# Altium PCB uku20710_proc_mount.PcbDoc (part 1 of 3)
Units mm, origin at the board's own origin, x right, y up, seen from the top; angles counter-clockwise.
Board outline 354.7 x 156.7 mm, 4 copper layers (Top Layer, MidLayer1, MidLayer2, Bottom Layer); 269 components, 535 nets, 989 pads, 687 vias.
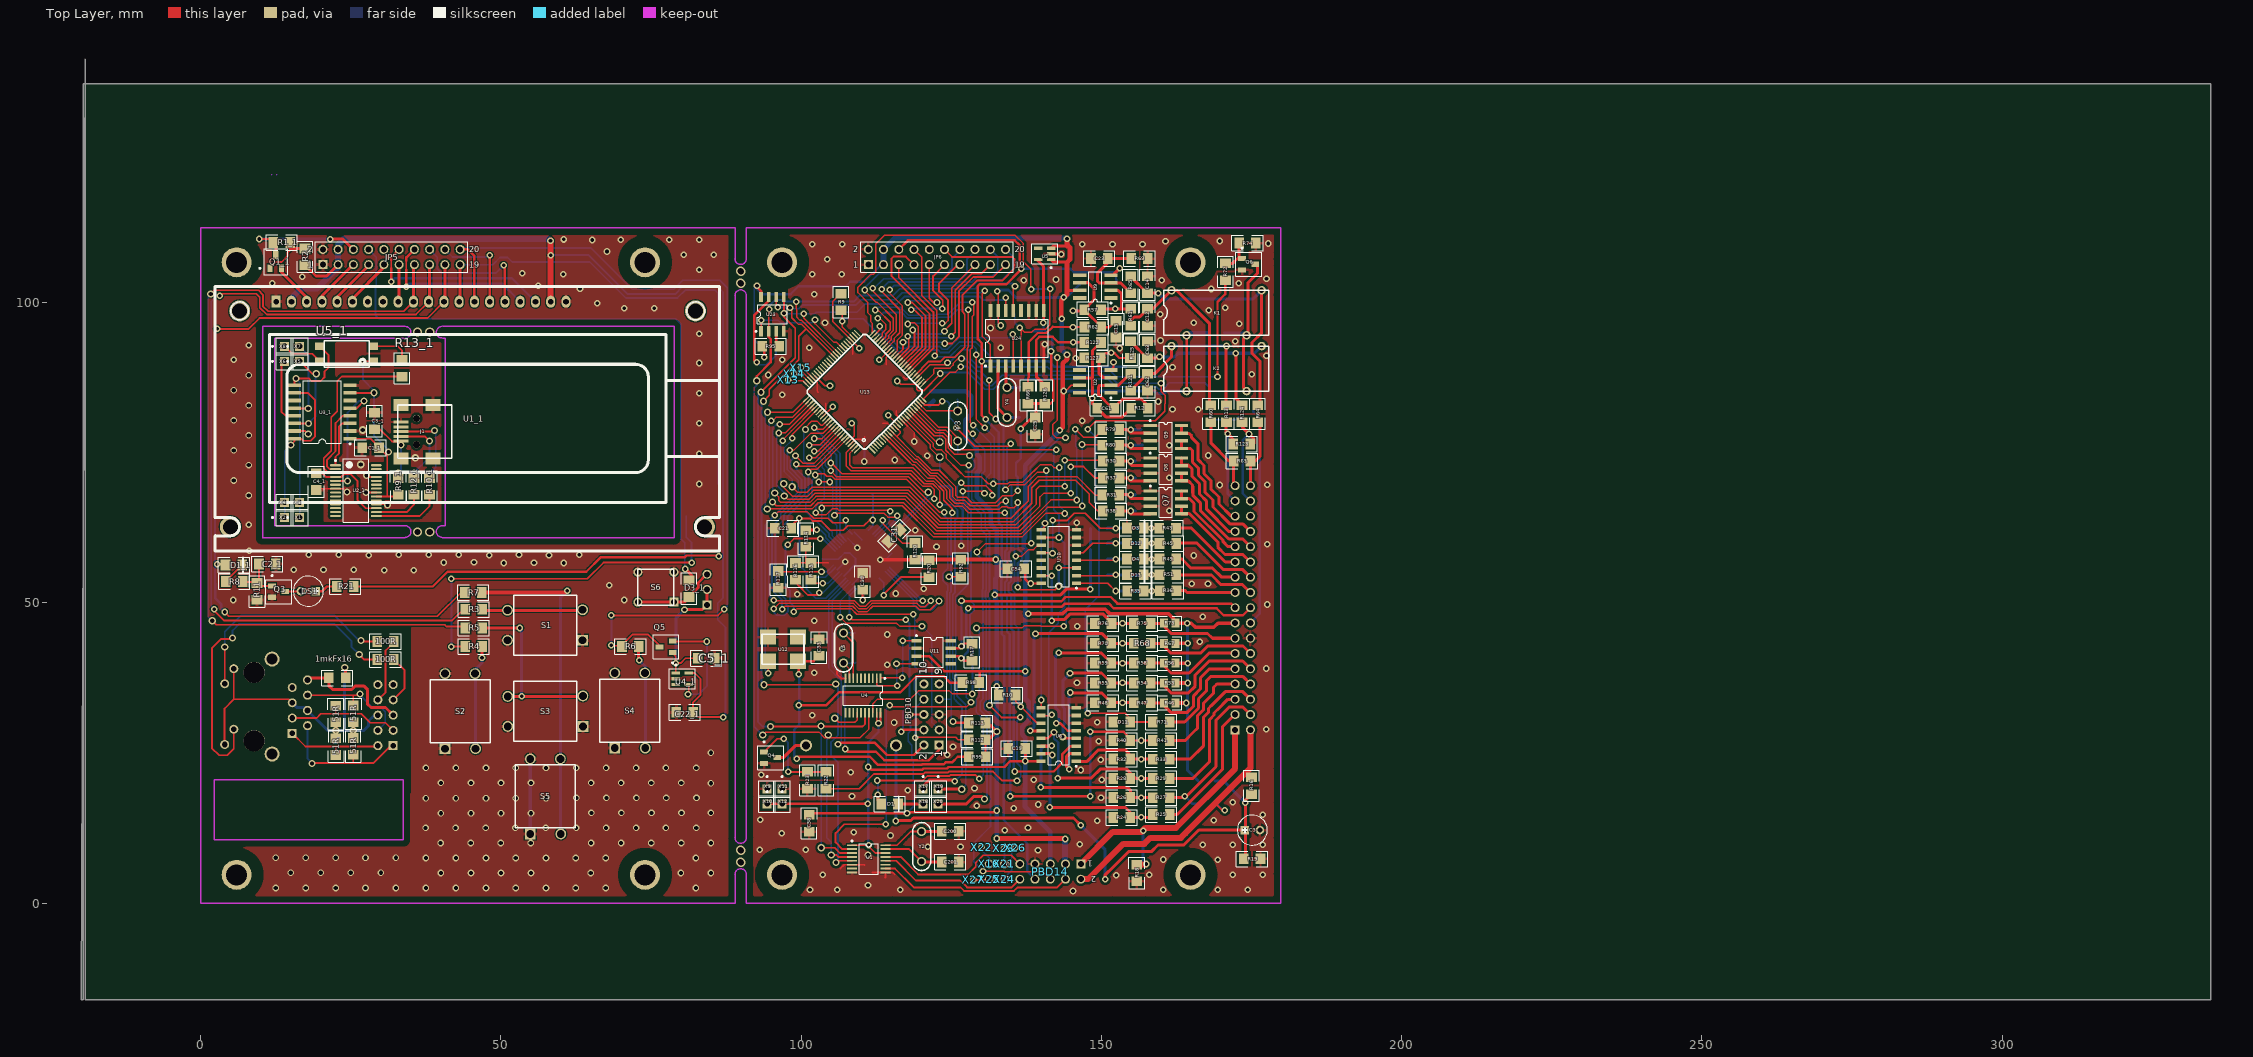
[diagram p0: Top Layer view]
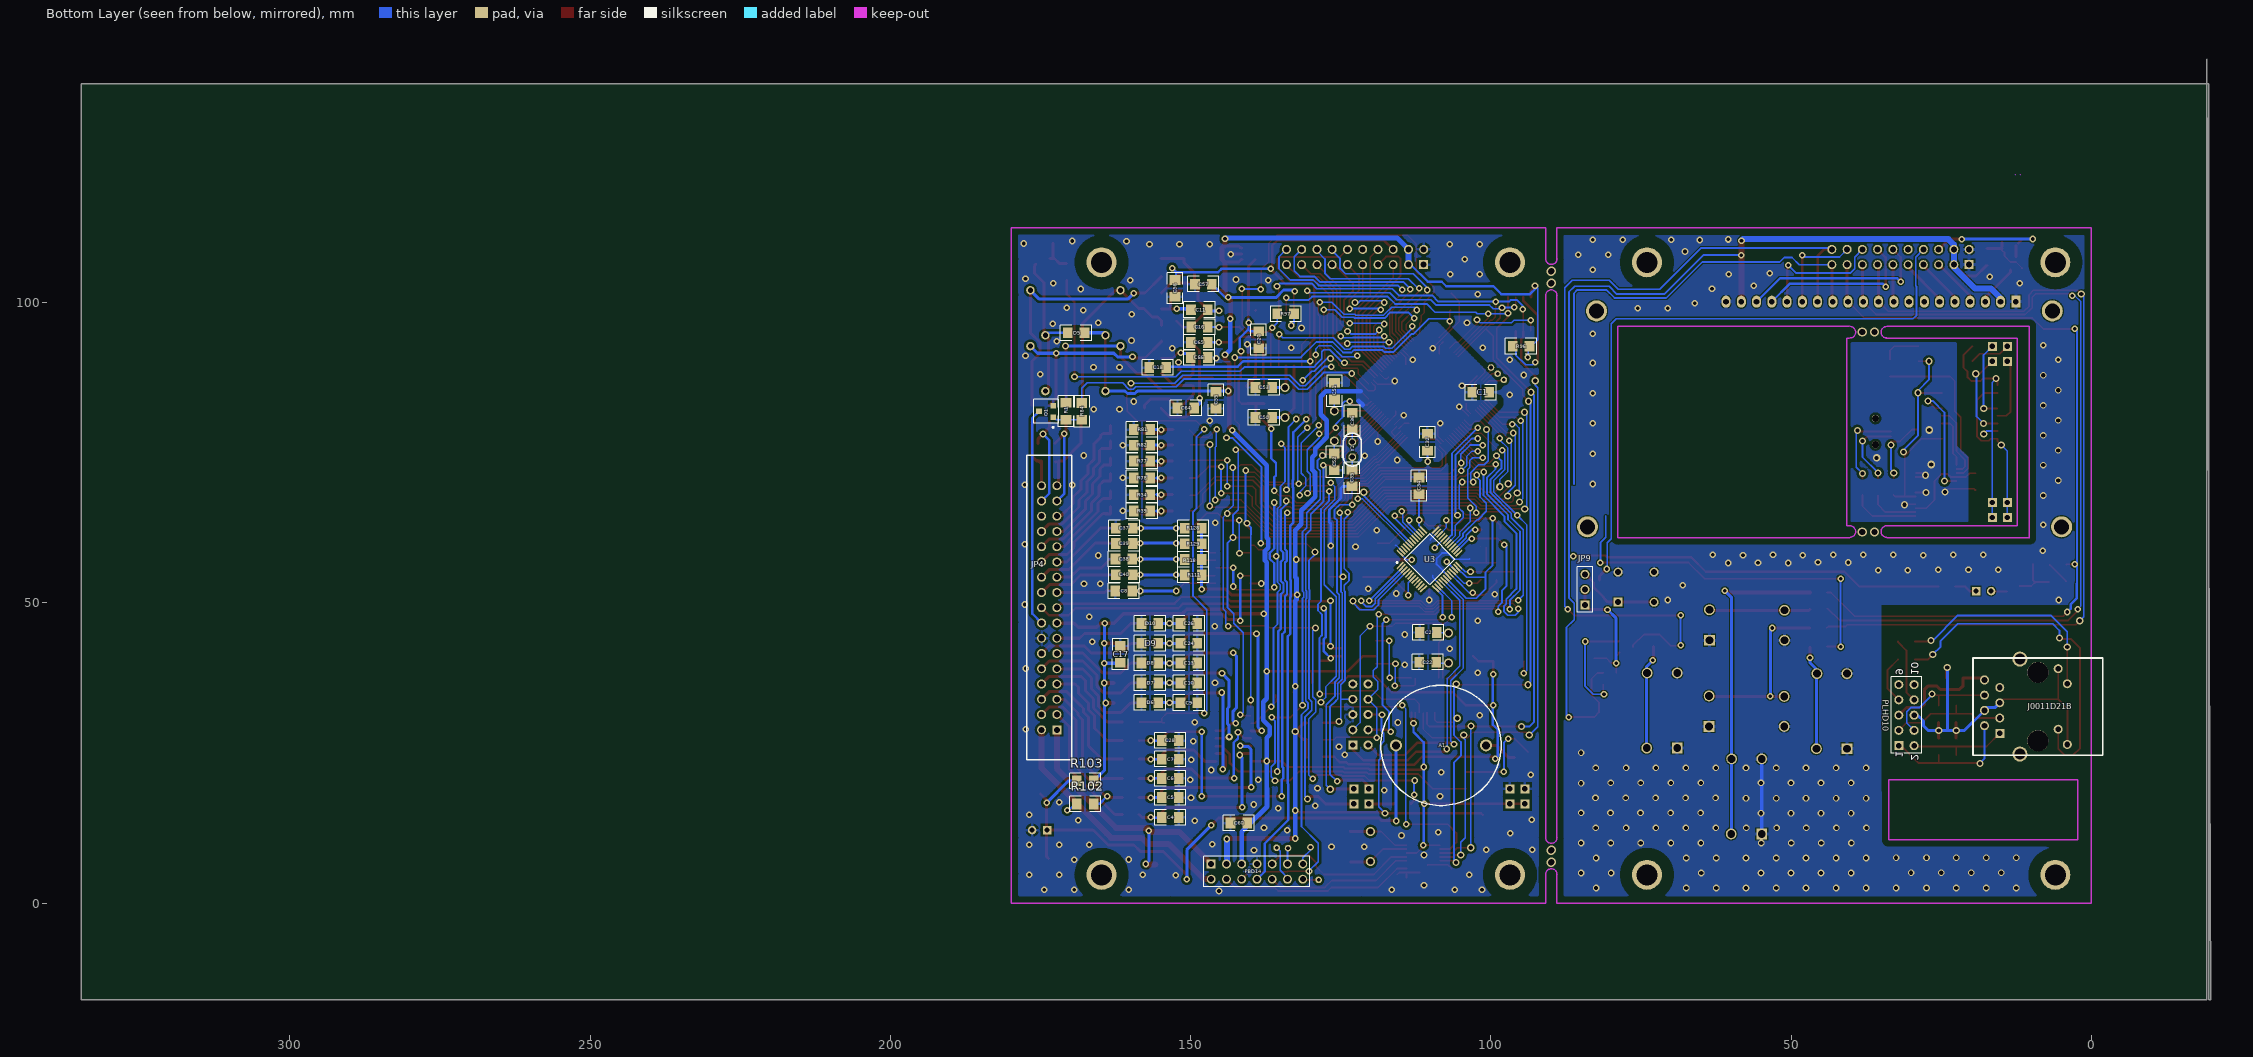
[diagram p1: Bottom Layer view, seen from below]

## Layer stack, top to bottom
Top Layer: signal copper 0.0356
Dielectric: core 0.32, FR-4, Dk 4.8
MidLayer1: signal copper 0.0356
Dielectric: prepreg 0.32, FR-4, Dk 4.8
MidLayer2: signal copper 0.0356
Dielectric: core 0.32, FR-4, Dk 4.8
Bottom Layer: signal copper 0.0356

## Board outline
-19.226,140.55 -19.226,-16.15 334.774,-16.15 334.774,136.4 -19.576,136.4 -19.576,-16.15 -19.926,-16.15

## Design rules (kind name [scope] priority, off if disabled: settings)
Clearance Holes [InPoly vs HasPad('Free-0') Or HasPad('Free-1') Or HasPad('Free-2') Or HasPad('Free-3')] p1: gap=2
Clearance Clearance_2 [All vs InPoly and InNet(GND_P)] p2: gap=1
Clearance Высоковольтное_2 [InNet(NetC511_2) or
InNet(NetD500_1) or
InNet(NetD503_1) or
InNet(NetD501_1) or
InNet(NetC500_2) or
InNet(NetC512_2) or
InNet(NetD500_2) or
InNet(NetD505_1) or
InNet(NetD506_1) or
InNet(NetD505_2) or
InNet(NetBT2_1) or
InNet(NetC516_2) or
InNet(NetC516_1) or
InNet(NetD20_2)  or
InNet(NetC510_1) or
InNet(NetC513_2) or
InNet(NetC517_1) vs InPoly] p3: gap=0.6
Clearance Высоковольтное [InNet(NetC505_2) or InNet(NetFU500_1)
or InNet(NetC511_1)or InNet(NetC502_2) vs InPoly] p4: gap=1
Clearance Clearance_1 [InComponent(U1)] p5: gap=0.19
Clearance Keep_Out [OnLayer('Keep-Out Layer')] p6: gap=1
Clearance Poly_Poly [InPoly vs InPoly] p7: gap=1
Clearance Poly [InPoly] p8: gap=0.4
Clearance "Для разъёма и индикатора" [InComponent(JP1) or InComponent(U2)] p9: gap=0.3
Clearance [All] p10: gap=0.18
ComponentClearance [All] p1: gap=0.254 collisioncheckmode=0
HoleSize [All] p1: absolutevalues=TRUE maxlimit=5 minlimit=0.025 maxpercent=80.000 minpercent=20.000
PolygonConnect [All] p1: connectstyle=Relief reliefconductorwidth=0.4 reliefentries=4 polygonreliefangle="90 Angle"
RoutingLayers [All] p1: top layer=Horizontal mid layer 1="Not Used" mid layer 2="Not Used" bottom layer=Vertical
RoutingVias [All] p1: holewidth=0.6 width=1.1 viastyle="Through Hole" minholewidth=0.6 minwidth=1.1 maxholewidth=0.7 maxwidth=1.2
SolderMaskExpansion [All] p1: expansion=0.102
TestPointUsage [All] p1: valid=0 allowmultiple=FALSE
Testpoint [All] p1: side=15 testpointundercomponent=TRUE minsize=1.016 maxsize=2.54 preferedsize=1.524 minholesize=0 maxholesize=1.016 preferedholesize=0.813 testpointgrid=0.025 style=1023 order=-539222988
Width [All] p1: maxlimit=2 minlimit=0.2 preferedwidth=0.254 toplayer_prefwidth=0.4 midlayer1_prefwidth=0.3 midlayer2_prefwidth=0.3 bottomlayer_prefwidth=0.4 minimp=50.000000 maximp=50.000000 favimp=50.000000
15 further rules are at their usual default settings.

## Classes and differential pairs
component class IBPV11: +IAKB1 C4 C5 C6 C7 C8 C9 C10 C11 C12 C13 C14 C15 C16 C17 C18 C19 C20 C23 C24 C25 C26 C28 C37 C38 C39 C40 C61 C62 C63 C64 C65 C66 D3 D4 D5 D6 D7 D8 D9 D10 D11 D12 D13 K1 K2 NetC25_1 NetJ1_2 NetU14_4 NetU14_5 P0_3 P0_8_ P0_9_ P1_29 P1_31 PROG1 Q1 Q6 Q7 Q8 Q9 R1 R12 R13 R24 R25 R26 R27 R28 R29 R30 R31 R32 R33 R34 R35 R36 R37 R38 R39 R40 R41 R43 R45 R46 R47 R48 R49 R51 R53 R54 R55 R56 R57 R58 R59 R60 R61 R62 R63 R64 R65 R66 R67 R68 R69 R70 R71 R72 R73 R74 R75 R76 R77 R78 R79 R80 R81 R82 R84 R111 R118 R121 R122 R123 R124 R125 R126 R127 R128 R129 U2 U6 U9 U10 UU2 X39 X40 X41 X42 X43 X44 X45 X46 X47
component class CPU: A1 C1 C2 C3 C22 C35 C36 C50 C51 C52 C53 C54 C55 C56 C57 C58 C60 C200 C201 D1 JP4 JP6 PBD14 Q4 R9 R10 R16 R17 R18 R19 R22 R23 R92 R95 R96 R97 R102 R103 U1 U4 U5 U11 U13 U23 U24 X9 X10 X11 X12 X13 X14 X15 X16 X17 X18 X19 X20 X21 X22 X23 X24 X25 X26 X27 Y1 Y2 Y3 Y4 Y5
component class ETH: C21 C30 C31 C32 C33 C34 PBD10 R20 R98 R99 R112 R113 R114 R115 R116 R117 R120 U3 U12

## Components (designator, comment, footprint, x,y, rotation, side; value= is the part's Value field where it differs from the comment)
1mkFx16 "0.1" C3216-1206 22.75,37.501 r0 top (schematic designator C303)
51R "49.9R" _1206#1 22.506,26.058 r90 top (schematic designator R301)
51R "49.9R" _1206#1 25.406,26.058 r270 top (schematic designator R302)
51R "49.9R" _1206#1 22.506,31.459 r270 top (schematic designator R303)
51R "49.9R" _1206#1 25.406,31.509 r90 top (schematic designator R304)
100R "K10" _1206#1 30.8,40.551 r0 top (schematic designator R305)
100R "K10" _1206#1 30.8,43.551 r0 top (schematic designator R306)
A1 "EFM260" Pjezo15 103.3,26.256 r0 bottom
C1 "1.0" _1206#1 101.674,85.05 r180 bottom
C1_1 "1.0" _1206#1 28.307,75.82 r0 top (schematic designator C1)
C2 "Cap Semi" _1206#1 110.402,45.061 r180 bottom
C2_1 "1.0" _1206#2 11.103,56.415 r180 top (schematic designator C2)
C3 "22.0 x 50" el3 173.874,12.15 r0 top
C3_1 "1.0" C3216-1206 28.957,80.271 r270 top (schematic designator C3)
C4 "1.0" _1206#3 153.374,14.25 r180 bottom (schematic designator C11)
C4_1 "1.0" C3216-1206 19.255,70.169 r90 top (schematic designator C4)
C5 "1.0" _1206#3 153.374,17.55 r180 bottom
C5_1 "1.0" _1206#1 84.197,40.761 r180 top (schematic designator C5)
C6 "1.0" _1206#3 153.374,20.75 r180 bottom (schematic designator C7)
C7 "1.0" _1206#3 153.374,23.95 r180 bottom (schematic designator C13)
C8 "1.0" _1206#3 161.115,51.963 r0 bottom (schematic designator C?)
C9 "1.0" _1206#3 150.274,33.35 r180 bottom (schematic designator C8)
C10 "1.0" _1206#3 150.274,36.65 r180 bottom (schematic designator C16)
C11 "0.1" _1206#3 148.524,98.8 r0 bottom
C12 "1.0" _1206#3 157.674,97.55 r90 top
C13 "1.0" _1206#3 150.274,39.95 r180 bottom
C14 "1.0" _1206#3 157.674,102.95 r270 top
C15 "1.0" _1206#3 152.424,95.574 r90 top
C16 "1.0" _1206#3 148.524,95.9 r180 bottom
C17 "1.0" _1206#3 161.715,41.41 r270 bottom
C18 "1.0" _1206#3 155.474,89.15 r180 bottom
C19 "1.0" _1206#3 135.884,25.705 r0 top
C20 "1.0" _1206#3 138.659,93.803 r90 bottom
C21 "0.1" C3216-1206 96.975,62.401 r180 top
C22 "Cap Semi" _1206#1 110.502,40.11 r180 bottom
C22_1 "1.0" _1206#1 80.6,31.751 r180 top (schematic designator C?)
C23 "0.1" _1206#3 149.662,107.327 r180 top
C24 "1.0" _1206#3 150.274,43.25 r180 bottom
C25 "1.0" _1206#3 138.974,79.45 r90 top
C26 "1.0" _1206#3 150.274,46.55 r180 bottom
C28 "1.0" _1206#3 153.374,27.05 r180 bottom
C30 "0.1" _1206#1 110.252,53.535 r270 top
C31 "0.1" _1206#1 115.479,61.2 r45 top
C32 "0.1" _1206#1 110.551,76.718 r270 bottom
C33 "0.1" _1206#1 102.976,42.56 r90 top
C34 "10,0x16" C3216-1206 111.952,69.467 r90 bottom
C35 "33" _1206#1 123.124,70.8 r90 bottom
C36 "33" _1206#1 123.074,80.25 r270 bottom
C37 "1.0" _1206#1 161.065,62.416 r0 bottom
C38 "1.0" _1206#1 161.115,57.264 r0 bottom
C39 "1.0" _1206#1 161.065,59.865 r0 bottom
C40 "1.0" _1206#1 161.065,54.664 r0 bottom
C50 "10" _1206#1 137.774,80.85 r180 bottom
C51 "10" _1206#3 126.024,85.25 r270 bottom
C52 "10" _1206#3 126.074,73.45 r90 bottom
C53 "10" _1206#1 137.774,85.85 r180 bottom
C54 "1.0" _1206#3 135.758,55.664 r0 top
C55 "1.0" _1206#3 145.774,83.75 r90 bottom
C56 "1.0" _1206#3 152.574,102.35 r90 bottom
C57 "1.0" _1206#3 147.874,103.05 r180 bottom
C58 "1.0" _1206#1 101.326,13.302 r90 top
C60 "1.0" _1206#3 141.96,13.303 r180 bottom
C61 "0.1" _1206#3 150.724,82.4 r0 top
C62 "1.0" _1206#3 157.674,86.75 r90 top
C63 "1.0" _1206#3 157.674,92.15 r270 top
C64 "1.0" _1206#3 150.774,82.45 r180 bottom
C65 "1.0" _1206#3 148.574,93.35 r180 bottom
C66 "0.1" _1206#3 148.574,90.85 r180 bottom
C200 "10" _1206#1 124.805,11.953 r180 top (schematic designator C2)
C201 "10" _1206#1 124.805,6.802 r180 top
D1 "LL4148" _1206d#1 114.729,16.503 r180 top
D1_1 "LL4148" _1206d#2 5.548,56.279 r180 top (schematic designator D1)
D3 "BZV55-C5V6" _1206d#1 155.663,62.416 r180 top
D3_1 "LL4148" _1206d#3 81.35,52.351 r90 top (schematic designator D3)
D4 "BZV55-C5V6" _1206d#1 155.663,57.264 r180 top
D5 "LL4148" _1206d#4 169.074,94.95 r0 bottom
D6 "BZV55-C5V6" _1206d#1 156.774,33.35 r0 bottom
D7 "BZV55-C5V6" _1206d#1 156.774,36.65 r0 bottom
D8 "BZV55-C5V6" _1206d#4 156.774,39.95 r0 bottom
D9 "BZV55-C5V6" _1206d#4 156.774,43.25 r0 bottom
D10 "BZV55-C5V6" _1206d#1 156.774,46.55 r0 bottom
D11 "BZV55-C3V9" _1206d#1 153.374,30.15 r180 top
D12 "BZV55-C5V6" _1206d#1 155.663,59.865 r180 top
D13 "BZV55-C5V6" _1206d#1 155.663,54.664 r180 top
DS1 "LED0" el3 19.197,51.928 r180 top
J1 "miniUSB" USBmini 41.81,78.501 r90 top
J0011D21B "J0011D21B" J0011D21B 8.902,32.709 r270 bottom (schematic designator J301)
JP4 "IDC34" IDC34M 172.274,28.85 r90 bottom
JP5 "PLHD-20" HDR2X10 20.35,106.301 r0 top
JP6 "PBD-20" HDR2X10 111.174,106.3 r0 top
JP9 "PLS-3" HDR1X3 84.321,49.664 r90 bottom
K1 "DH1A" kuan 161.674,94.55 r0 top
K2 "DH1A" kuan 161.674,85.25 r0 top
PBD10 "Header 10H" HDR2X5#1 122.981,26.307 r90 top (schematic designator JP2)
PBD14 "PBD-10" HDR2X5#2 146.561,6.5 r180 top (schematic designator JP1)
PLHD10 "Header 10H" HDR2X5#3 32.058,26.208 r90 bottom (schematic designator JP1)
Q1 "IRLML2402" SO-G3/Z3.3 174.068,81.871 r90 bottom
Q1_1 "BC856" SO-G3#1 12.5,106.801 r0 top (schematic designator Q1)
Q3 "BC846" SO-G3#2 13,51.878 r270 top
Q4 "BC846" SO-G3#1 94.924,24.205 r270 top
Q5 "IRLML2402" SO-G3#1 77.5,42.651 r90 top (schematic designator Q?)
Q6 "BC846" SO-G3#1 174.524,106.377 r270 top
Q7 "IRF7103" SO-G8/Y2.2#1 160.724,66.7 r270 top
Q8 "IRF7103" SO-G8/Y2.2#2 160.724,72.2 r270 top
Q9 "IRF7103" SO-G8/Y2.2#2 160.724,77.6 r270 top
R1 "10K" _1206#1 170.717,81.871 r270 bottom
R1_1 "2K2" _1206#4 13.5,110.001 r0 top (schematic designator R90)
R2 "7K5" _1206#4 17.4,107.601 r270 top (schematic designator R89)
R3 "2K7" _1206#1 45.45,48.901 r180 top
R4 "2K7" _1206#1 45.45,42.701 r180 top
R5 "2K7" _1206#1 45.45,45.801 r180 top
R6 "2K7" _1206#1 71.55,42.701 r180 top
R7 "2K7" _1206#4 45.4,51.701 r180 top (schematic designator R11)
R8 "2K7" _1206#2 5.597,53.528 r180 top
R9 "10K" _1206#1 106.65,100.074 r270 top
R9_1 "1R" _1206#1 32.908,69.369 r270 top (schematic designator R9)
R10 "2K7" _1206#1 134.284,34.658 r180 top
R10_1 "20R" _1206#1 38.109,69.369 r270 top (schematic designator R10)
R11 "10K" _1206#2 9.397,51.878 r270 top
R12 "20K" _1206#1 156.324,82.4 r180 top
R12_1 "20R" _1206#1 35.509,69.369 r270 top (schematic designator R12)
R13 "10R" _1206#1 170.817,81.47 r270 top
R13_1 "200R" _1206#1 33.508,89.073 r90 top (schematic designator R?)
R16 "10K" _1206#1 174.974,19.55 r90 top
R17 "K10" _1206#3 128.456,41.76 r90 top
R18 "1R" _1206#3 155.889,5 r270 top
R19 "2K7" _1206#1 175.074,7.35 r180 top
R20 "10K" _1206#1 121.302,55.685 r90 top
R21 "270R" _1206#2 24.103,52.728 r0 top
R22 "1K0" _1206#1 104.126,20.454 r90 top
R23 "10K" _1206#1 101.025,20.454 r90 top
R24 "1K0" _1206#1 153.374,14.25 r180 top
R25 "33K" _1206#1 159.974,14.753 r0 top
R26 "1K0" _1206#1 153.374,17.55 r180 top
R27 "33K" _1206#1 159.974,17.55 r0 top
R28 "1K0" _1206#1 153.374,20.75 r180 top
R29 "33K" _1206#1 159.974,20.75 r0 top
R30 "1K0" _1206#1 151.624,73.6 r0 top
R31 "1K0" _1206#1 151.574,67.95 r0 top
R32 "1K0" _1206#1 153.374,23.95 r180 top
R33 "33K" _1206#1 159.974,23.95 r0 top
R34 "10K" _1206#1 158.074,68 r180 bottom
R35 "1K0" _1206#1 155.663,51.963 r180 top (schematic designator R?)
R36 "33K" _1206#1 161.115,52.013 r0 top (schematic designator R?)
R37 "1K0" _1206#1 151.624,70.8 r0 top
R38 "1K0" _1206#4 151.624,65.3 r0 top
R39 "10K" _1206#1 158.074,65.3 r180 bottom
R40 "1K0" _1206#1 153.374,27.05 r180 top
R41 "10K" _1206#1 159.974,27.05 r0 top
R43 "6K2" _1206#1 161.015,62.416 r180 top
R45 "6K2" _1206#1 161.065,59.865 r180 top
R46 "1K0" _0805 161.374,33.35 r0 top
R47 "2K7" _1206#1 156.774,33.35 r180 top
R48 "10K" _1206#1 150.274,33.35 r0 top
R49 "6K2" _1206#1 161.065,57.264 r180 top
R51 "6K2" _1206#1 161.065,54.664 r180 top
R53 "1K0" _0805 161.374,36.65 r0 top
R54 "2K7" _1206#1 156.774,36.65 r180 top
R55 "10K" _1206#1 150.274,36.65 r0 top
R56 "1K0" _0805 161.374,39.95 r0 top
R57 "20K" _1206#1 148.524,98.8 r180 top
R58 "2K7" _1206#1 156.774,39.95 r180 top
R59 "10K" _1206#1 150.274,39.95 r0 top
R60 "10R" _1206#1 168.216,81.47 r270 top
R61 "2K0" _1206#1 154.874,97.55 r90 top
R62 "20K" _1206#1 148.574,95.9 r180 top
R63 "10R" _1206#4 173.418,73.618 r180 top
R64 "10R" _1206#4 176.018,81.47 r270 top
R65 "2K0" _1206#4 154.874,102.95 r270 top
R66 "20K" _1206#1 137.774,84.55 r270 top
R67 "1K0" _0805 161.374,43.211 r0 top
R68 "2K7" _1206#1 156.774,43.25 r180 top
R69 "20K" _1206#1 156.324,107.3 r180 top
R70 "10K" _1206#1 150.274,43.25 r0 top
R71 "20K" _1206#1 159.974,30.15 r0 top
R72 "1K0" _1206#4 170.667,105.126 r90 top
R73 "1K0" _0805 161.374,46.612 r0 top
R74 "10K" _1206#1 174.318,109.878 r180 top
R75 "2K7" _1206#1 156.774,46.55 r180 top
R76 "10K" _1206#4 150.274,46.55 r0 top
R77 "10K" _1206#1 158.074,73.6 r180 bottom
R78 "10K" _1206#1 158.074,70.8 r180 bottom
R79 "1K0" _1206#1 151.574,78.85 r0 top
R80 "1K0" _1206#1 151.574,76.25 r0 top
R81 "10K" _1206#1 158.074,78.85 r180 bottom
R82 "10K" _1206#1 158.074,76.25 r180 bottom
R84 "1K0" _1206#3 168.116,81.871 r270 bottom
R92 "1K0" _1206#1 126.556,55.75 r90 top
R95 "2K7" _1206#1 94.924,92.7 r180 top
R96 "2K7" _1206#1 94.974,92.7 r0 bottom
R97 "1K0" _1206#1 134.158,98.125 r180 bottom
R98 "1R" _1206#1 128.282,36.708 r0 top
R99 "1R" _1206#1 129.333,24.355 r0 top
R102 "10R" _1206#1 167.542,16.504 r0 bottom
R103 "10R" _1206#1 167.542,20.355 r180 bottom
R111 "33K" _1206#1 149.574,54.614 r0 bottom (schematic designator R?)
R112 "2K2" _1206#1 129.307,27.207 r0 top
R113 "2K2" _1206#1 129.307,30.007 r0 top
R114 "2K2" _1206#1 100.776,60.685 r270 top
R115 "2K2" _1206#1 101.652,55.235 r90 top
R116 "2K2" _1206#1 99.052,55.235 r90 top
R117 "4K87" _1206#1 96.174,53.898 r90 top
R118 "33K" _1206#1 149.574,57.214 r0 bottom (schematic designator R?)
R120 "2K2" _1206#1 118.952,58.535 r270 top (schematic designator R100)
R121 "2K0" _1206#1 154.874,86.75 r90 top (schematic designator R101)
R122 "20K" _1206#1 148.524,93.35 r180 top (schematic designator R102)
R123 "10R" _1206#1 173.368,76.419 r180 top (schematic designator R103)
R124 "10R" _1206#1 173.418,81.47 r270 top (schematic designator R104)
R125 "2K0" _1206#1 154.874,92.15 r270 top (schematic designator R105)
R126 "20K" _1206#1 140.574,84.55 r270 top (schematic designator R106)
R127 "20K" _1206#1 148.524,90.8 r0 top (schematic designator R107)
R128 "33K" _1206#1 149.574,62.4 r0 bottom (schematic designator R?)
R129 "33K" _1206#1 149.574,59.815 r0 bottom (schematic designator R?)
S1 "SWT-9" SWT-9 63.6,43.751 r180 top (schematic designator S2)
S2 "SWT-9" SWT-9 40.7,25.701 r90 top (schematic designator S4)
S3 "SWT-9" SWT-9 63.65,29.401 r180 top (schematic designator S1)
S4 "SWT-9" SWT-9 68.97,25.801 r90 top (schematic designator S5)
S5 "SWT-9" SWT-9 54.9,11.501 r90 top (schematic designator S3)
S6 "SWT-6" SWT-6 78.8,50.101 r180 top
U1 "SC16IS740" TSSO5X6-G16 111.252,7.352 r270 top
U1_1 "AG1232G" AG1232G 44.45,80.701 r0 top (schematic designator U4)
U2 "OP07CS" SO-G8#1 148.974,86.85 r90 top
U2_1 "FT232R" SOP65P780-28L 25.856,68.668 r0 top (schematic designator U2)
U3 "DP8348C" F-QFP7X7-G48/N 110.202,57.235 r135 bottom
U3_1 "ISO7231" SO-G16/D10.4 20.255,81.772 r90 top (schematic designator U3)
U4 "MCP2515" TSSO6X6-G20/D6.6 110.302,34.559 r180 top
U4_1 "TPS3823" SO-G5/P.95 80.2,37.351 r270 top (schematic designator U?)
U5 "TPS76333" SO-G5/P.95 140.558,108.1 r90 top
U5_1 "FOD817ASD" FOD817ASD 28.807,90.224 r90 top (schematic designator U5)
U6 "MC14051BD" SO-G16/C5.85#1 142.874,28.05 r90 top
U9 "OP07CS" SO-G8#2 148.974,102.65 r90 top
U10 "MC14051BD" SO-G16/C5.85#2 142.924,57.7 r90 top
U11 "TJA1050" SO-G8/D5 122.055,41.76 r270 top
U12 "KXO-97-50MGz" KXO-97 96.974,42.259 r180 top
U13 "LPC1766FBD100" LPC2368 110.574,85.15 r45 top
U23 "25LC640" SO-G8/D5 95.224,98.05 r0 top
U24 "AD7705" SO-G16/D10.4 135.974,94.05 r0 top
X1 "" PIN1#1 16.5,64.201 r90 top
X2 "" PIN1#1 14,64.201 r90 top
X3 "" PIN1#1 16.5,66.701 r90 top
X4 "" PIN1#1 14,66.701 r90 top
X5 "" PIN1#1 16.5,90.201 r90 top
X6 "" PIN1#1 14,90.201 r90 top
X7 "" PIN1#1 16.5,92.701 r90 top
X8 "" PIN1#1 14,92.701 r90 top
X9 "" PIN1#1 94.322,19 r0 top
X10 "" PIN1#1 94.322,16.5 r0 top
X11 "" PIN1#1 96.822,19 r0 top
X12 "" PIN1#1 96.822,16.5 r0 top
X13 "" PIN1#2 84.771,88.071 r90 top
X14 "" PIN1#3 73.769,96.073 r90 top
X15 "" PIN1#4 85.422,97.573 r90 top
X16 "" PIN1#5 133.234,-1.702 r90 top
X17 "" PIN1#1 120.322,19 r0 top
X18 "" PIN1#1 120.322,16.5 r0 top
X19 "" PIN1#1 122.822,19 r0 top
X20 "" PIN1#1 122.822,16.5 r0 top
X21 "" PIN1#6 224.189,3.009 r90 top
X22 "" PIN1#7 126.632,-8.953 r90 top
X23 "" PIN1#8 133.584,-11.504 r90 top
X24 "" PIN1#9 138.685,-11.904 r90 top
X25 "" PIN1#10 133.834,-3.402 r90 top
X26 "" PIN1#11 140.335,-10.504 r90 top
X27 "" PIN1#12 120.18,-5.903 r90 top
Y1 "32768" QWARZ2 123.079,76.749 r270 bottom
Y2 "10MGz" QWARZ1 120.054,6.902 r90 top
Y3 "10MGz" QWARZ1 126.074,81.95 r270 top
Y4 "4,9152MGz" QWARZ1 134.274,80.85 r90 top
Y5 "8MGz" QWARZ1 107.051,39.96 r90 top

## Footprints (in the part's own frame and the unit in brackets; to place one, negate y for a bottom-side part, rotate by r counter-clockwise, add the part's x,y. Pads: shape width x height; smd on the part's side, far side on the other; paste and mask are expansions set on the pad)
_0805 [mm]
  rect 1.3x1.5 smd: 1(-0.942,-0.005) 2(0.958,-0.005)
  silkscreen extent -1.99,-1.16 2.01,1.14
_1206#1 [mm]
  rect 1.6x1.8 smd: 1(-1.412,-0.007) 2(1.388,-0.007)
  silkscreen extent -2.61,-1.31 2.59,1.29
_1206#2 [mm]
  rect 1.6x1.8 smd: 1(-1.409,-0.014) 2(1.391,-0.015)
  silkscreen extent -2.61,-1.31 2.59,1.29
_1206#3 [mm]
  rect 1.6x1.8 smd: 1(-1.397,0.003) 2(1.403,0.003)
  silkscreen extent -2.6,-1.3 2.6,1.3
_1206#4 [mm]
  rect 1.6x1.8 smd: 1(-1.4,0) 2(1.4,0)
  silkscreen extent -2.6,-1.3 2.6,1.3
_1206d#1 [mm]
  rect 1.6x1.8 smd: 1(1.395,-0.009) 2(-1.405,-0.009)
  silkscreen extent -2.6,-1.31 2.6,1.29
_1206d#2 [mm]
  rect 1.6x1.8 smd: 1(1.403,-0.017) 2(-1.397,-0.017)
  silkscreen extent -2.6,-1.32 2.6,1.28
_1206d#3 [mm]
  rect 1.6x1.8 smd: 1(1.405,0.012) 2(-1.395,0.012)
  silkscreen extent -2.6,-1.29 2.6,1.31
_1206d#4 [mm]
  rect 1.6x1.8 smd: 1(1.4,0) 2(-1.4,0)
  silkscreen extent -2.6,-1.3 2.6,1.3
AG1232G [mm]
  rect 1.5x2 hole 0.95: 1(-31.877,19.431)
  oval 1.5x2 hole 0.95: 2(-29.337,19.431) 3(-26.797,19.431) 4(-24.257,19.431) 5(-21.717,19.431) 6(-19.177,19.431) 7(-16.637,19.431) 8(-14.097,19.431) 9(-11.557,19.431) 10(-9.017,19.431) 11(-6.477,19.431) 12(-3.937,19.431) 13(-1.397,19.431) 14(1.143,19.431) 15(3.683,19.431) 16(6.223,19.431) 17(8.763,19.431) 18(11.303,19.431) 19(13.843,19.431) 20(16.383,19.431)
  silkscreen extent -42.04,-22.1 41.96,21.97
C3216-1206 [mm]
  rect 1.6x1.8 smd: 1(-1.4,0) 2(1.4,0)
  silkscreen extent -2.6,-1.3 2.6,1.3
el3 [mm]
  rect 1.4x1.4 hole 0.85: 1(0.011,-0.008)
  round 1.4 hole 0.85: 2(2.511,-0.008)
  silkscreen extent -1.23,-2.51 3.76,2.49
F-QFP7X7-G48/N [mm]
  rect 1.55x0.3 smd: 1(-4.192,2.749) 2(-4.192,2.249) 3(-4.192,1.749) 4(-4.192,1.249) 5(-4.192,0.749) 6(-4.192,0.249) 7(-4.192,-0.251) 8(-4.192,-0.751) 9(-4.192,-1.251) 10(-4.192,-1.751) 11(-4.192,-2.251) 12(-4.192,-2.751) 25(4.158,-2.751) 26(4.158,-2.251) 27(4.158,-1.751) 28(4.158,-1.251) 29(4.158,-0.751) 30(4.158,-0.251) 31(4.158,0.249) 32(4.158,0.749) 33(4.158,1.249) 34(4.158,1.749) 35(4.158,2.249) 36(4.158,2.749)
  rect 0.3x1.55 smd: 13(-2.767,-4.176) 14(-2.267,-4.176) 15(-1.767,-4.176) 16(-1.267,-4.176) 17(-0.767,-4.176) 18(-0.267,-4.176) 19(0.233,-4.176) 20(0.733,-4.176) 21(1.233,-4.176) 22(1.733,-4.176) 23(2.233,-4.176) 24(2.733,-4.176) 37(2.733,4.174) 38(2.233,4.174) 39(1.733,4.174) 40(1.233,4.174) 41(0.733,4.174) 42(0.233,4.174) 43(-0.267,4.174) 44(-0.767,4.174) 45(-1.267,4.174) 46(-1.767,4.174) 47(-2.267,4.174) 48(-2.767,4.174)
  silkscreen extent -4.32,-3 2.98,3.57
FOD817ASD [mm]
  rect 1.3x1.5 smd: 1(0,0) 2(2.5,0) 3(2.5,9) 4(0,9)
  silkscreen extent -0.97,0.75 3.4,8.22
HDR1X3 [mm]
  rect 1.5x1.5 hole 1: 1(0,0)
  round 1.5 hole 1: 2(2.54,0) 3(5.08,0)
  silkscreen extent -1.27,-1.27 6.35,1.27
HDR2X5#1 [mm]
  rect 1.5x1.5 hole 0.9: 1(0,0)
  round 1.5 hole 0.9: 2(0,2.54) 3(2.54,0) 4(2.54,2.54) 5(5.08,0) 6(5.08,2.54) 7(7.62,0) 8(7.62,2.54) 9(10.16,0) 10(10.16,2.54)
  silkscreen extent -1.27,-1.27 11.43,3.81
HDR2X5#2 [mm]
  rect 1.5x1.5 hole 1: 1(0,0)
  round 1.5 hole 1: 2(0,2.54) 3(2.54,0) 4(2.54,2.54) 5(5.08,0) 6(5.08,2.54) 7(7.62,0) 8(7.62,2.54) 9(10.16,0) 10(10.16,2.54)
HDR2X5#3 [mm]
  rect 1.5x1.5 hole 0.9: 1(0,0)
  round 1.5 hole 0.9: 2(0,-2.54) 3(2.54,0) 4(2.54,-2.54) 5(5.08,0) 6(5.08,-2.54) 7(7.62,0) 8(7.62,-2.54) 9(10.16,0) 10(10.16,-2.54)
  silkscreen extent -1.27,-3.81 11.43,1.27
HDR2X10 [mm]
  rect 1.5x1.5 hole 1: 1(0,0)
  round 1.5 hole 1: 2(0,2.54) 3(2.54,0) 4(2.54,2.54) 5(5.08,0) 6(5.08,2.54) 7(7.62,0) 8(7.62,2.54) 9(10.16,0) 10(10.16,2.54) 11(12.7,0) 12(12.7,2.54) 13(15.24,0) 14(15.24,2.54) 15(17.78,0) 16(17.78,2.54) 17(20.32,0) 18(20.32,2.54) 19(22.86,0) 20(22.86,2.54)
  silkscreen extent -1.27,-1.27 24.13,3.81
IDC34M [mm]
  rect 1.5x1.5 hole 1: 1(0,0)
  round 1.5 hole 1: 2(0,2.54) 3(2.54,0) 4(2.54,2.54) 5(5.08,0) 6(5.08,2.54) 7(7.62,0) 8(7.62,2.54) 9(10.16,0) 10(10.16,2.54) 11(12.7,0) 12(12.7,2.54) 13(15.24,0) 14(15.24,2.54) 15(17.78,0) 16(17.78,2.54) 17(20.32,0) 18(20.32,2.54) 19(22.86,0) 20(22.86,2.54) 21(25.4,0) 22(25.4,2.54) 23(27.94,0) 24(27.94,2.54) 25(30.48,0) 26(30.48,2.54) 27(33.02,0) 28(33.02,2.54) 29(35.56,0) 30(35.56,2.54) 31(38.1,0) 32(38.1,2.54) 33(40.64,0) 34(40.64,2.54)
  silkscreen extent -5,-2.5 45.7,5
J0011D21B [mm]
  round 2.5 hole 1.8: 0(-7.9,-3) 0(7.9,-3)
  round 3.5 hole 3.5: 0(-5.7,0) 0(5.7,0)
  rect 1.5x1.5 hole 0.95: 1(4.445,-6.35)
  round 1.5 hole 0.95: 2(3.175,-8.9) 3(1.905,-6.35) 4(0.635,-8.9) 5(-0.635,-6.35) 6(-1.905,-8.9) 7(-3.175,-6.35) 8(-4.445,-8.9) 9(6.31,4.9) 10(3.77,3.38) 11(-3.8,4.9) 12(-6.31,3.38)
  silkscreen extent -8.1,-10.8 8.1,10.8
kuan [mm]
  round 1.4 hole 0.85: 1(15.006,7.49) 3(0.006,7.49) 4(2.506,-0.01) 5(12.506,-0.01)
  silkscreen extent -1.34,-0.01 16.21,7.49
KXO-97 [mm]
  rect 2.7x2.5 smd: 1(-2.5,-2) 2(2.5,-2) 3(2.5,2) 4(-2.5,2)
  silkscreen extent -3.5,-2.5 3.5,2.5
LPC2368 [mm]
  rect 0.25x1.5 smd: 1(-6,-7.775)
  oval 0.25x1.5 smd: 2(-5.5,-7.75) 3(-5,-7.75) 4(-4.5,-7.75) 5(-4,-7.75) 6(-3.5,-7.75) 7(-3,-7.75) 8(-2.5,-7.75) 9(-2,-7.75) 10(-1.5,-7.75) 11(-1,-7.75) 12(-0.5,-7.75) 13(0,-7.75) 14(0.5,-7.75) 15(1,-7.75) 16(1.5,-7.75) 17(2,-7.75) 18(2.5,-7.75) 19(3,-7.75) 20(3.5,-7.75) 21(4,-7.75) 22(4.5,-7.75) 23(5,-7.75) 24(5.5,-7.75) 25(6,-7.75) 51(6,7.75) 52(5.5,7.75) 53(5,7.75) 54(4.5,7.75) 55(4,7.75) 56(3.5,7.75) 57(3,7.75) 58(2.5,7.75) 59(2,7.75) 60(1.5,7.75) 61(1,7.75) 62(0.5,7.75) 63(0,7.75) 64(-0.5,7.75) 65(-1,7.75) 66(-1.5,7.75) 67(-2,7.75) 68(-2.5,7.75) 69(-3,7.75) 70(-3.5,7.75) 71(-4,7.75) 72(-4.5,7.75) 73(-5,7.75) 74(-5.5,7.75) 75(-6,7.75)
  oval 1.5x0.25 smd: 26(7.75,-6) 27(7.75,-5.5) 28(7.75,-5) 29(7.75,-4.5) 30(7.75,-4) 31(7.75,-3.5) 32(7.75,-3) 33(7.75,-2.5) 34(7.75,-2) 35(7.75,-1.5) 36(7.75,-1) 37(7.75,-0.5) 38(7.75,0) 39(7.75,0.5) 40(7.75,1) 41(7.75,1.5) 42(7.75,2) 43(7.75,2.5) 44(7.75,3) 45(7.75,3.5) 46(7.75,4) 47(7.75,4.5) 48(7.75,5) 49(7.75,5.5) 50(7.75,6) 76(-7.75,6) 77(-7.75,5.5) 78(-7.75,5) 79(-7.775,4.475) 80(-7.75,4) 81(-7.75,3.5) 82(-7.75,3) 83(-7.75,2.5) 84(-7.75,2) 85(-7.75,1.5) 86(-7.75,1) 87(-7.75,0.5) 88(-7.75,0) 89(-7.75,-0.5) 90(-7.75,-1) 91(-7.75,-1.5) 92(-7.75,-2) 93(-7.75,-2.5) 94(-7.775,-3.025) 95(-7.75,-3.5) 96(-7.75,-4) 97(-7.75,-4.5) 98(-7.75,-5) 99(-7.75,-5.5) 100(-7.75,-6)
  silkscreen extent -6.93,-6.93 6.93,6.93
PIN1#1 [mm]
  rect 1.5x1.5 hole 0.9: 1(0,0)
  silkscreen extent -1.4,-1.4 1.4,2.17
PIN1#2 [mm]
  round 1.1 hole 0.6: 1(-0.95,-13.053)
PIN1#3 [mm]
  round 1.1 hole 0.6: 1(-7.923,-25.106)
PIN1#4 [mm]
  round 1.1 hole 0.6: 1(-8.402,-14.55)
PIN1#5 [mm]
  round 1.5 hole 1: 1(8.202,1.913)
PIN1#6 [mm]
  round 1.5 hole 1: 1(3.491,90.328)
PIN1#7 [mm]
  round 1.1 hole 0.6: 1(18.255,-3.401)
PIN1#8 [mm]
  round 1.1 hole 0.6: 1(20.655,-0.188)
PIN1#9 [mm]
  round 1.5 hole 1: 1(15.864,4.824)
PIN1#10 [mm]
  round 1.5 hole 1: 1(7.362,2.513)
PIN1#11 [mm]
  round 1.1 hole 0.6: 1(19.705,4.664)
PIN1#12 [mm]
  round 1.1 hole 0.6: 1(9.752,-8.502)
Pjezo15 [mm]
  round 2 hole 1.3: 1(-2.503,0.012) 2(12.497,0.012)
  silkscreen extent -5.02,-10 15.01,10.02
QWARZ1 [mm]
  round 1.5 hole 1: 1(0.008,0) 2(5.008,0)
  silkscreen extent -1.49,-1.5 6.51,1.5
QWARZ2 [mm]
  round 1.3 hole 0.85: 1(0.001,0.005) 2(2.501,0.005)
  silkscreen extent -1.5,-1.5 4,1.5
SO-G3#1 [mm]
  rect 0.85x1.3 smd: 1(-0.948,-1.102) 2(0.952,-1.102) 3(0.002,1.098)
  silkscreen extent -2.77,-2.15 2,2.15
SO-G3#2 [mm]
  rect 0.85x1.3 smd: 1(-0.944,-1.105) 2(0.956,-1.105) 3(0.006,1.095)
  silkscreen extent -2.77,-2.16 2.01,2.14
SO-G3/Z3.3 [mm]
  rect 0.9x0.95 smd: 1(-0.954,-1.179) 2(0.946,-1.179) 3(-0.004,1.171)
  silkscreen extent -2.78,-2.05 2,2.05
SO-G5/P.95 [mm]
  rect 0.55x1.45 smd: 1(-0.95,-1.075) 2(0,-1.075) 3(0.95,-1.075) 4(0.95,1.075) 5(-0.95,1.075)
  silkscreen extent -2.42,-2.2 1.65,2.2
SO-G8#1 [mm]
  rect 0.6x2.2 smd: 1(-1.905,-2.6) 2(-0.635,-2.6) 3(0.635,-2.6) 4(1.905,-2.6) 5(1.905,2.6) 6(0.635,2.6) 7(-0.635,2.6) 8(-1.905,2.6)
  silkscreen extent -2.88,-2.72 2.5,1.1
SO-G8#2 [mm]
  rect 0.6x2.2 smd: 1(-1.902,-2.611) 2(-0.632,-2.611) 3(0.638,-2.611) 4(1.908,-2.611) 5(1.908,2.589) 6(0.638,2.589) 7(-0.632,2.589) 8(-1.902,2.589)
  silkscreen extent -2.88,-2.74 2.5,1.09
SO-G8/D5 [mm]
  rect 0.6x1.7 smd: 1(-1.905,-2.85) 2(-0.635,-2.85) 3(0.635,-2.85) 4(1.905,-2.85) 5(1.905,2.85) 6(0.635,2.85) 7(-0.635,2.85) 8(-1.905,2.85)
  silkscreen extent -2.88,-2.97 2.5,1.6
SO-G8/Y2.2#1 [mm]
  rect 0.55x2.2 smd: 1(-1.91,-2.588) 2(-0.64,-2.588) 3(0.63,-2.588) 4(1.9,-2.588) 5(1.9,2.612) 6(0.63,2.612) 7(-0.64,2.612) 8(-1.91,2.612)
  silkscreen extent -2.86,-2.71 2.49,1.11
SO-G8/Y2.2#2 [mm]
  rect 0.55x2.2 smd: 1(-1.905,-2.6) 2(-0.635,-2.6) 3(0.635,-2.6) 4(1.905,-2.6) 5(1.905,2.6) 6(0.635,2.6) 7(-0.635,2.6) 8(-1.905,2.6)
  silkscreen extent -2.85,-2.72 2.5,1.1
SO-G16/C5.85#1 [mm]
  rect 0.6x1.55 smd: 1(-4.452,-2.93) 2(-3.182,-2.93) 3(-1.912,-2.93) 4(-0.642,-2.93) 5(0.628,-2.93) 6(1.898,-2.93) 7(3.168,-2.93) 8(4.438,-2.93) 9(4.438,2.92) 10(3.168,2.92) 11(1.898,2.92) 12(0.628,2.92) 13(-0.642,2.92) 14(-1.912,2.92) 15(-3.182,2.92) 16(-4.452,2.92)
  silkscreen extent -5.4,-3.05 4.99,1.75
SO-G16/C5.85#2 [mm]
  rect 0.6x1.55 smd: 1(-4.445,-2.925) 2(-3.175,-2.925) 3(-1.905,-2.925) 4(-0.635,-2.925) 5(0.635,-2.925) 6(1.905,-2.925) 7(3.175,-2.925) 8(4.445,-2.925) 9(4.445,2.925) 10(3.175,2.925) 11(1.905,2.925) 12(0.635,2.925) 13(-0.635,2.925) 14(-1.905,2.925) 15(-3.175,2.925) 16(-4.445,2.925)
  silkscreen extent -5.39,-3.05 5,1.75
SO-G16/D10.4 [mm]
  rect 0.6x2.15 smd: 1(-4.445,-4.625) 2(-3.175,-4.625) 3(-1.905,-4.625) 4(-0.635,-4.625) 5(0.635,-4.625) 6(1.905,-4.625) 7(3.175,-4.625) 8(4.445,-4.625) 9(4.445,4.625) 10(3.175,4.625) 11(1.905,4.625) 12(0.635,4.625) 13(-0.635,4.625) 14(-1.905,4.625) 15(-3.175,4.625) 16(-4.445,4.625)
  silkscreen extent -5.42,-4.75 5.2,3.15
SOP65P780-28L [mm]
  oval 1.8x0.35 smd: 1(-3.396,4.231) 2(-3.396,3.581) 3(-3.396,2.931) 4(-3.396,2.281) 5(-3.396,1.631) 6(-3.396,0.981) 7(-3.396,0.331) 8(-3.396,-0.319) 9(-3.396,-0.969) 10(-3.396,-1.619) 11(-3.396,-2.269) 12(-3.396,-2.919) 13(-3.396,-3.569) 14(-3.396,-4.219) 15(3.404,-4.219) 16(3.404,-3.569) 17(3.404,-2.919) 18(3.404,-2.269) 19(3.404,-1.619) 20(3.404,-0.969) 21(3.404,-0.319) 22(3.404,0.331) 23(3.404,0.981) 24(3.404,1.631) 25(3.404,2.281) 26(3.404,2.931) 27(3.404,3.581) 28(3.404,4.231)
  silkscreen extent -3.52,-5.29 2.1,5.31
SWT-6 [mm]
  rect 1.5x1.5 hole 1: 1(-0.009,-0.001)
  round 1.5 hole 1: 1(5.991,-0.001) 2(-0.009,-5.001) 2(5.991,-5.001)
  silkscreen extent -0.01,-5.5 5.99,0.5
SWT-9 [mm]
  rect 1.8x1.8 hole 1.3: 1(0,0)
  round 1.8 hole 1.3: 1(12.5,0) 2(0,-5.08) 2(12.5,-5)
  silkscreen extent 1,-7.5 11.5,2.5
TSSO5X6-G16 [mm]
  rect 0.3x1.65 smd: 1(-2.275,-2.775) 2(-1.625,-2.775) 3(-0.975,-2.775) 4(-0.325,-2.775) 5(0.325,-2.775) 6(0.975,-2.775) 7(1.625,-2.775) 8(2.275,-2.775) 9(2.275,2.775) 10(1.625,2.775) 11(0.975,2.775) 12(0.325,2.775) 13(-0.325,2.775) 14(-0.975,2.775) 15(-1.625,2.775) 16(-2.275,2.775)
  silkscreen extent -3.1,-2.9 2.55,1.55
TSSO6X6-G20/D6.6 [mm]
  rect 0.3x1.6 smd: 1(-2.925,-2.85) 2(-2.275,-2.85) 3(-1.625,-2.85) 4(-0.975,-2.85) 5(-0.325,-2.85) 6(0.325,-2.85) 7(0.975,-2.85) 8(1.625,-2.85) 9(2.275,-2.85) 10(2.925,-2.85) 11(2.925,2.85) 12(2.275,2.85) 13(1.625,2.85) 14(0.975,2.85) 15(0.325,2.85) 16(-0.325,2.85) 17(-0.975,2.85) 18(-1.625,2.85) 19(-2.275,2.85) 20(-2.925,2.85)
  silkscreen extent -3.75,-2.97 3.3,1.65
USBmini [mm]
  round 1.2 hole 1.2: 0(-2.2,5.85) 0(2.2,5.85)
  rect 0.5x2.5 smd: 1(-1.6,8.43) 2(-0.8,8.43) 3(0,8.43) 4(0.8,8.43) 5(1.6,8.45)
  rect 2x2.5 smd: 6(-4.45,8.43) 6(-4.45,3.158) 6(4.45,8.43) 6(4.45,3.158)
  silkscreen extent -4.45,0 4.45,9

## Part data
1mkFx16 C1_1 C3_1 C4 C4_1 C5 C6 C7 C8 C9 C10 C11 C12 C13 C14 C15 C16 C17 C18 C19 C20 C21 C23 C24 C25 C26 C30 C31 C32 C33 C35 C36 C50 C51 C52 C53 C54 C55 C56 C57 C60 C61 C62 C63 C64 C65 C66: library part "Cap Semi", "Capacitor (Semiconductor SIM Model)"
51R 51R 51R 51R 100R 100R R1 R1_1 R2 R3 R4 R5 R6 R7 R8 R9 R10 R11 R12 R13 R16 R17 R18 R19 R20 R21 R22 R23 R24 R25 R26 R27 R28 R29 R30 R31 R32 R33 R34 R35 R36 R37 R38 R39 R40 R41 R43 R45 R46 R47 R48 R49 R51 R53 R54 R55 R56 R57 R58 R59 R60 R61 R62 R63 R64 R65 R66 R67 R68 R69 R70 R71 R72 R73 R74 R75 R76 R77 R78 R79 R80 R81 R82 R84 R92 R95 R96 R97 R98 R99 R102 R103 R111 R112 R113 R114 R115 R116 R117 R118 R120 R121 R122 R123 R124 R125 R126 R127 R128 R129: library part Res2, "Resistor"
A1: library part PJEZ0
C1 C2_1 C5_1 C22_1 C28 C37 C38 C39 C40 C58 C200 C201: library part "Cap Semi", "Capacitor"
C2 C22: "Capacitor (Semiconductor SIM Model)"
C3 C34: library part "Cap Pol1", "Polarized Capacitor (Radial)"
D1 D1_1: library part Diode, "Diode"
D3 D4 D5 D6 D7 D8 D9 D10 D11 D12 D13: library part "D Zener", "Zener Diode"
D3_1: library part Diode, "Default Diode"
DS1: "Typical INFRARED GaAs LED"
J1: library part "Header 6", "Header, 6-Pin"
JP4: library part MHDR2X13, "Header, 13-Pin, Dual row"
JP5 JP6: library part "Header 10X2", "Header, 10-Pin, Dual row"
JP9: library part "Header 3", "Header, 3-Pin"
K1 K2: library part BS115, "Single-Pole Dual-Throw Relay"
PBD10 PLHD10: "Header, 10-Pin, Right Angle"
PBD14: library part "Header 5X2", "Header, 5-Pin, Dual row"
Q1 Q5: "HEXFET Power MOSFET"
Q1_1: library part GT109
Q3: library part GT122, "Bipolar transistor"
Q4 Q6: library part GT122
Q7 Q8 Q9: library part IRF7301, "HEXFET Power MOSFET"
R9_1 R10_1 R12_1 R13_1: library part RES
S1 S2 S3 S4 S5: "Switch"
S6: library part SWT-9, "Switch"
U2 U9: "Ultra-Low Offset Voltage Operational Amplifier"
U4_1: "Reset IC"
U5: library part LP2980AIM5-3.3, "Micropower SOT, 50 mA Ultra Low-Dropout Regulator"
U5_1: library part F00817ASD
U6 U10: "8-Channel Analog Multiplexer/Demultiplexer"
U12: library part KXO-97
U13: library part LPC2368FBD100
X1 X2 X3 X4 X5 X6 X7 X8 X9 X10 X11 X12 X13 X14 X15 X16 X17 X18 X19 X20 X21 X22 X23 X24 X25 X26 X27: library part Socket, "Socket"
Y1 Y2 Y3 Y4 Y5: library part XTAL, "Crystal Oscillator"

## Free pads (board coordinates)
  round 5 hole 3.5: 0(6,4.701) 0(6,106.701) 0(74,4.701) 0(74,106.701) 0(96.824,106.7) 0(96.824,4.7) 0(164.824,4.7) 0(164.824,106.7)
  round 3.5 hole 2.5: 51(6.5,98.601) 52(4.95,62.651) 53(83.9,62.651) 54(82.4,98.601)

## Via types
v1: diameter 1.1, hole 0.6, Top Layer to Bottom Layer, 508 vias
v2: diameter 1.1, hole 0.7, Top Layer to Bottom Layer, 105 vias
v3: diameter 1.2, hole 0.7, Top Layer to Bottom Layer, 58 vias
v4: diameter 1.5, hole 1, Top Layer to Bottom Layer, 12 vias
v5: diameter 1.27, hole 0.711, Top Layer to Bottom Layer, 3 vias
v6: diameter 1.2, hole 0.6, Top Layer to Bottom Layer, 1 vias

## Nets (pads, with @x,y where several pads share a name; then routed paths per layer and width w, separated by ;. In a path a pad name is that pad's centre, name@x,y a point inside that pad or via, vN(x,y) a via of type N, cw(c..) or ccw(c..) an arc to the next point about the centre after c; other vN are vias at no path point)
485-DD: PBD14.4 U1.10 | length 32.4
  Top Layer w0.3: U1.10@114.027,5.727 115.628,5.727 118.754,2.601 126.531,2.601 127.132,1.999 135.434,1.999 136.035,2.601 142.661,2.601 143.986,3.925 143.986,3.95 PBD14.4@143.936,3.95
  Top Layer w0.5: PBD14.4@143.974,3.913 143.986,3.925 PBD14.4@144.021,3.96
485-RX: PBD14.9 U1.13 | length 25.9
  Top Layer w0.3: U1.13@114.027,7.677 116.553,7.677 119.479,4.751 127.783,4.751 129.082,6.05 129.082,6.7 130.333,7.95 134.951,7.95 PBD14.9@136.401,6.5
485-TX: PBD14.10 U1.12 | length 24.8
  Top Layer w0.3: U1.12@114.027,7.027 115.803,7.027 119.079,3.751 126.482,3.751 127.632,2.601 135.041,2.601 PBD14.10@136.401,3.96
+3V3: C1.1 C30.1 C31.1 C32.1 C58.2 PBD10.6 PBD14.3 R9.1 R10.2 R20.2 R92.2 R99.2 R111.1 R112.2 R113.2 R114.2 R115.2 R116.2 R118.1 R120.2 R128.1 R129.1 U3.22 U3.32 U3.48 U13.13 U13.28 U13.42 U13.54 U13.71 U13.84 U13.96 | length 254.1
  Top Layer w0.25: R116.2@99.059,56.623 100.75,56.623 R115.2@101.659,56.623 104.489,56.623 104.502,56.635 ; 101.702,59.304 101.702,59.335 ; U13.71@102.266,87.802 103.768,86.3 103.774,86.3 103.925,86.15 v1(104.8,86.15) ; U13.84@103.68,81.084 105.246,82.65 v1(105.274,82.65) ; R9.1@106.7,101.574 106.65,101.574 106.602,101.527 105.249,100.174 105.249,96.839 U13.54@108.276,93.812 109.674,92.414 v1(109.674,92.4) ; U13.96@107.923,76.841 108.801,77.72 108.801,79.57 v1(108.451,79.92) ; v1(113.024,90.45) 113.046,90.45 U13.42@114.64,92.044 ; v1(114.524,81.2) U13.13@116.055,79.67 ; v1(116.024,86.922) 116.574,86.372 118.867,86.372 U13.28@119.59,87.095
  Top Layer w0.3: 100.726,56.6 100.75,56.623 100.776,56.65 R114.2@100.776,59.25
  Top Layer w0.4: C58.2@101.376,14.704 101.626,14.954 v1(117.63,14.954) 117.778,15.103 132.283,15.103 v1(132.583,15.403) ; v1@117.68,14.703 v1@118.08,15.103 ; v1(118.13,31.358) 118.158,31.387 PBD10.6@120.441,31.387 ; R99.2@130.683,24.255 130.694,24.266 R112.2@130.694,27.2 ; R10.2@132.574,34.39 v1@132.574,36.008 ; R10.2@132.574,35.342 R10.2@132.807,35.109
  Top Layer w0.5: R112.2@130.694,27.2 131.2,27.2 v3(132.557,28.557) 131.157,29.957 R113.2@130.707,29.957 ; v1(132.207,51.313) 143.21,51.313 144.16,52.263 v1(148.162,52.263)
  Top Layer w0.6: v1@113.252,57.185 113.202,57.185 113.152,57.185 v1(113.202,57.135) 118.946,57.135 R20.2@121.309,57.135 ; R120.2@118.531,57.2 126.562,57.2 128.805,57.2 v1(132.374,57.2) v1@132.474,57.2
  Top Layer w0.8: v1(132.574,10.75) 143.863,10.75 v1(143.96,10.653)
  Bottom Layer w0.25: U3.22@106.024,55.508 v1(107.352,56.835) ; U3.32@107.792,60.705 109.352,59.145 v1(109.352,59.135) ; v1(113.202,57.135) 114.016,57.135 U3.48@115.11,58.23
  Bottom Layer w0.3: v1(117.63,14.954) 118.68,16.004 118.68,23.8 118.43,24.05 118.43,26.307 117.83,26.907 117.83,28.257 118.23,28.657 118.23,31.258 v1(118.13,31.358)
  Bottom Layer w0.5: v1@148.161,52.212 148.161,52.114 148.162,58.857 ; R129.1@148.162,59.607 R128.1@148.162,62.407
  Bottom Layer w0.7: 121.671,85.22 127.455,85.22
  Bottom Layer w0.8: 121.353,82.95 122.053,83.65 ; 127.455,85.22 128.324,84.351 128.324,81.35 127.324,80.35 127.324,77.6 128.356,76.569 ; 128.355,76.568 129.255,75.668 129.255,74.695 129.733,74.218 129.733,72.117 129.283,71.667 129.283,69.566 ; 129.255,69.566 129.255,67.668 130.907,66.017 ; 130.906,66.015 131.556,65.365 131.556,63.115 132.506,62.164 ; 132.415,62.26 132.508,62.166 132.574,62.1 ; 132.557,62.09 132.557,54.264 132.357,54.063 132.357,50.563 132.574,50.346 132.574,20.55 ; v1(132.574,10.75) 132.574,20.55
  Bottom Layer w1: v1(143.96,10.653) 143.96,6.502 PBD14.3@144.01,6.452
  other v1: 132.583,36.108
+5V: C17.2 C19.2 C54.2 C55.2 C57.2 C60.2 D5.2 JP4.15 JP6.3 JP6.4 K1.4 K2.4 PBD14.5 R46.2 R53.2 R56.2 R67.2 R73.2 R95.2 R96.1 R97.2 R98.2 R103.2 U1.1 U1.14 U2.7 U4.19 U4.20 U5.1 U5.3 U6.16 U9.7 U10.16 U11.3 U23.8 U24.15 X10.1 X12.1 | length 431.5
  Top Layer w0.25: v1(132.624,101.876) 132.799,101.7 U24.15@132.799,98.675 132.799,96.632 v1(133.258,96.174) ; U24.15@132.774,98.675 U24.15@132.774,99.2
  Top Layer w0.3: U1.1@108.477,9.627 111.051,9.627 112.351,8.327 U1.14@114.027,8.327 ; U4.19@112.577,31.709 112.577,30.208 v1(112.878,29.906) 113.229,30.256 113.229,31.707 U4.20@113.227,31.709 ; v1@144.024,85.25 144.989,86.215 U2.7@146.374,86.215
  Top Layer w0.4: R95.2@93.024,92.9 93.377,92.547 93.824,92.1 v1@93.824,91.15 ; X10.1@94.322,16.5 X12.1@96.822,16.5 v1@111.075,16.5 ; v1(111.178,22.655) 111.627,22.206 120.18,22.206 120.38,22.406 124.281,22.406 124.531,22.656 125.982,22.656 ; U11.3@119.205,41.125 121.289,41.125 123.805,38.61 v1(137.309,38.61) ; 125.982,22.655 133.834,22.655 134.777,23.598 U6.16@139.954,23.598 ; R98.2@129.733,36.708 129.733,38.609 ; 137.309,54.167 137.309,54.264 ; C54.2@137.343,55.28 137.343,53.876 v1@138.006,53.213 ; v1@138.209,53.213 U10.16@139.984,53.218 ; K1.4@164.18,94.54 K2.4@164.18,85.24 164.18,85.194 K2.4@164.224,85.15
  Top Layer w0.5: v1@92.497,102.726 92.547,102.676 93.319,101.904 U23.8@93.319,100.9 ; v1(137.335,23.655) C19.2@137.335,25.354 ; U5.1@141.399,107.15 141.574,107.15 141.604,107.121 141.974,106.75 144.074,106.75 ; U5.3@141.399,109.05 U5.3@141.624,109.05 ; U5.3@141.629,109.054 141.974,109.4 144.274,109.4 ; 144.274,102.018 U9.7@146.385,102.018
  Top Layer w0.6: v1(137.824,48.2) 143.586,48.2 144.286,48.9 150.656,48.9 151.356,48.2 161.124,48.2 162.525,46.799 162.724,46.6 162.774,46.6 164.974,46.6 165.674,45.9 168.724,45.9 169.424,46.6 172.274,46.6 JP4.15@172.324,46.6 ; R53.2@162.762,36.643 v1(164.368,36.643) ; R67.2@162.762,43.243 v1(164.368,43.243) ; R56.2@162.774,39.9 164.324,39.9 v1(164.374,39.95) ; R46.2@162.824,33.3 v1@163.824,33.3
  Top Layer w0.8: v1(143.074,78.7) 143.574,79.2 143.574,85.271 143.574,89.85 144.274,90.55 v1@144.274,91.273 ; v1(143.41,97.324) 143.31,97.424 143.31,100.375 144.274,101.34 144.274,106.691 144.759,107.176 144.759,109.176 144.274,109.661 ; 144.274,109.4 v1(144.274,110.6)
  Bottom Layer w0.3: v1@92.497,102.726 92.174,102.403 92.174,93.75 93.39,92.535 93.774,92.15 93.774,91.15 v1@93.824,91.15 ; R97.2@132.77,98.118 132.77,96.661 v1(133.258,96.174) ; v1(164.274,46.6) v1@164.374,46.5 ; v1(164.368,36.643) v1@164.374,36.65
  Bottom Layer w0.4: v1@92.447,102.726 92.497,102.726 92.497,102.376 93.473,101.4 98.274,101.4 99.574,102.7 107.424,102.7 108.174,103.45 110.474,103.45 113.324,106.3 JP6.3@113.714,106.3 ; v1(111.078,16.503) v1@111.178,16.603 ; v1@111.178,9.952 111.178,26.756 112.878,28.456 v1(112.878,29.906) ; v1@137.324,48.2 v1(137.824,48.2) ; 137.359,53.213 v1(138.259,53.213) ; v1(143.724,100.85) 144.235,100.85 C57.2@146.361,102.976
  Bottom Layer w0.5: v1(132.624,101.876) 132.824,102.076 134.508,102.076 135.733,100.85 v1(143.724,100.85) ; v1@144.024,85.24 145.778,85.24 158.873,85.24 159.273,84.84 160.503,84.84 160.903,85.24 K2.4@164.18,85.24 ; v1@164.374,46.5 164.374,22.067 R103.2@166.092,20.35
  Bottom Layer w0.6: C17.2@161.715,39.91 v1(164.374,39.95) ; K1.4@164.18,94.54 164.59,94.95 D5.2@167.674,94.95 D5.2@167.724,94.95
  Bottom Layer w0.8: JP6.4@113.714,108.84 115.624,110.75 144.124,110.75 v1(144.274,110.6) ; 137.274,19.05 137.274,16.038 140.281,13.031 141.481,11.832 PBD14.5@141.481,6.5 ; 137.324,19.05 137.324,27.491 136.808,28.007 136.808,29.341 137.909,30.442 137.909,33.474 137.324,34.058 137.324,42.5 137.324,56.727 137.588,56.991 137.588,58.638 137.074,59.152 137.074,60.6 137.324,60.85 137.324,67.35 137.324,72.9 v1@143.074,78.65 ; v1(143.41,97.324) 143.41,92.123 v1(144.26,91.273)
  Bottom Layer w1: JP6.3@113.714,106.3 JP6.4@113.714,108.84
  other v1: 111.228,9.601 164.115,33.308 143.71,85.271 93.848,90.873 92.647,102.776
+5V_IZ: 
+IAKB1: JP4.32 R123.1 R124.2 | length 16.5
  Top Layer w0.5: R124.2@173.568,80.062 173.524,80.1 173.524,80.062 173.524,79.15 175.374,77.3 175.374,76.557 R123.1@175.387,76.557
  Bottom Layer w0.4: v1(174.574,78.1) 173.518,77.043 173.518,68.247 JP4.32@174.814,66.95
+IAKB2: JP4.34 R63.1 R64.2 | length 13
  Top Layer w0.5: JP4.34@174.814,69.49 174.814,73.615 R63.1@174.818,73.618 175.618,73.618 176.368,74.369 176.368,79.72 R64.2@176.018,80.07 ; R63.1@174.814,73.09 175.374,73.65 175.674,73.65 ; R64.2@176.374,80.05 176.374,80.1 R64.2@176.399,80.075
+UOUT: JP4.2 PBD14.2 R16.2 R102.2 | length 45.9
  Top Layer w0.4: 168.969,16.607 170.125,15.45 v1@170.28,15.45
  Top Layer w1: PBD14.2@146.561,3.96 147.77,3.96 153.66,9.85 157.162,9.85 158.164,10.852 163.214,10.852 163.965,11.603 174.814,22.452 JP4.2@174.814,28.85
  Bottom Layer w0.4: R102.2@168.93,16.511 169.219,16.511 v1@170.28,15.45
  Bottom Layer w1: JP4.2@174.764,28.84 174.774,28.85 JP4.2@174.814,28.85
  other v1: 170.543,15.45
-5V: C18.2 C56.2 JP6.6 PBD14.8 U2.4 U9.4 | length 183
  Top Layer w0.4: JP6.6@116.254,108.84 117.764,110.35 135.574,110.35 136.374,109.55 136.374,105.25 134.174,103.05 129.724,103.05 129.424,102.75 129.424,93.9 130.074,93.25 130.074,81.2 v1(130.724,80.55) ; v1(152.012,90.023) 152.012,89.193 U2.4@151.574,88.755 U2.4@152.079,88.755 ; 152.424,105.05 152.474,105.05
  Top Layer w0.5: U9.4@151.585,104.558 151.894,104.558 v1(153.063,105.727)
  Bottom Layer w0.4: v1(130.074,90.2) 141.274,90.2 ; v1(130.724,80.55) 132.874,78.4 132.874,70.518 133.007,70.385 133.007,69.267 132.874,69.134 132.874,63.35 133.374,62.85 133.374,53.83 133.308,53.763 133.308,50.98 133.374,50.913 133.374,44.85 133.824,44.4 133.824,19.9 133.724,19.8 133.724,13.852 137.659,9.918 137.659,5.242 PBD14.8@138.941,3.96 ; v1(136.674,105.6) 144.874,105.6 145.424,105.05 152.412,105.05 ; 141.274,90.15 141.324,90.15 142.174,89.3 152.012,89.3 154.024,89.3 C18.2@154.074,89.25 ; 152.474,105.05 152.424,105.05 ; C56.2@152.524,103.75 152.424,103.85 152.424,105.05 ; v1(153.063,105.727) 152.412,105.076 152.412,105.05 ; 152.412,105.05 152.424,105.05
-5V_IZ: 
-IAKB1: JP4.31 R13.2 R123.2 | length 15.9
  Top Layer w0.5: R13.2@170.768,80.062 170.768,78.376 R123.2@172.587,76.557
  Bottom Layer w0.4: v1(171.024,78.119) 171.024,68.2 JP4.31@172.274,66.95
-IAKB2: JP4.33 R60.2 R63.2 | length 13.2
  Top Layer w0.5: R60.2@168.21,80.083 168.21,76.626 171.217,73.618 R63.2@172.018,73.618 172.018,69.747 JP4.33@172.274,69.49 JP4.33@172.524,69.74 ; R63.2@172.424,73.5 R63.2@172.524,73.4
-UOUT: JP4.1 PBD14.1 R18.1 | length 46.2
  Top Layer w1: PBD14.1@146.561,6.5 151.911,11.85 156.662,11.85 157.314,12.502 162.414,12.502 172.274,22.363 JP4.1@172.274,28.8 ; R18.1@155.839,6.45 157.39,6.45 v1(157.44,6.5) ; v1@156.89,12.152 156.89,12.102 v1(156.94,12.052)
  Bottom Layer w0.5: v1(156.94,12.052) 156.94,7.001 v1(157.44,6.5)
CANH: JP4.17 R17.2 U11.7 | length 58.2
  Top Layer w0.4: U11.7@124.905,42.395 126.341,42.395 127.156,43.211 R17.2@128.456,43.211 ; v1(126.706,50.363) 126.706,50.313 126.756,50.263 143.337,50.263 144.036,50.962 144.486,50.962 ; 144.486,50.963 151.562,50.963 152.662,49.862 171.582,49.862 JP4.17@172.274,49.17 ; JP4.17@172.26,49.17 JP4.17@172.267,49.162
  Bottom Layer w0.4: v1(126.706,42.761) v1(126.706,50.363)
CANL: JP4.18 R17.1 U11.6 | length 61.6
  Top Layer w0.4: U11.6@124.905,41.125 126.291,41.125 127.053,40.363 R17.1@128.453,40.363 ; v1(127.806,49.062) 128.106,49.362 143.437,49.362 143.937,49.862 151.262,49.862 152.062,49.062 169.217,49.062 170.379,47.9 173.544,47.9 JP4.18@174.814,49.17 JP4.18@174.794,49.17
  Bottom Layer w0.4: v1(126.656,40.76) 127.806,41.91 127.806,43.961 127.506,44.261 127.506,48.762 v1(127.806,49.062)
DB1: 
DB2: 
DB3: 
DB4: 
DB5: 
DB6: 
DB7: 
DT1: JP4.9 R46.1 R47.1 | length 20.9
  Top Layer w0.5: 157.187,33.357 157.202,33.372 157.231,33.343 158.187,33.343 159.962,33.343 160.197,33.109 161.555,31.75 164.308,31.75 165.366,32.808 165.366,34.509 166.516,35.659 166.516,37.509 168.017,39.01 JP4.9@172.274,39.01
DT2: JP4.10 R53.1 R54.1 | length 22.1
  Top Layer w0.5: 157.187,36.657 R54.1@158.187,36.657 159.949,36.657 159.962,36.643 160.197,36.409 161.605,35 164.507,35 165.616,36.109 165.616,37.959 167.956,40.3 173.524,40.3 JP4.10@174.814,39.01
DT3: JP4.11 R56.1 R58.1 | length 17.2
  Top Layer w0.5: 157.187,39.957 157.187,39.943 158.187,39.943 159.962,39.943 160.197,39.709 161.605,38.3 164.606,38.3 167.906,41.6 172.274,41.6 JP4.11@172.274,41.55
DT4: JP4.12 R67.1 R68.1 | length 19.3
  Top Layer w0.5: 157.187,43.257 157.2,43.243 158.187,43.243 159.962,43.243 160.216,42.989 161.605,41.6 166.506,41.6 167.706,42.8 173.564,42.8 JP4.12@174.814,41.55
DT5: JP4.13 R73.1 R75.1 | length 16.1
  Top Layer w0.5: 157.187,46.557 157.193,46.55 158.187,46.55 159.974,46.55 160.175,46.349 160.345,46.179 161.624,44.9 167.674,44.9 168.484,44.09 JP4.13@172.274,44.09